# Altium PCB segment_driver_large.PcbDoc
Units mil, origin at the board's own origin, x right, y up, seen from the top; angles counter-clockwise.
Board outline 11250 x 3440 mil, 2 copper layers (Top Layer, Bottom Layer); 36 components, 48 nets, 184 pads, 452 vias.
Unrouted connection lines stored in the file: 31.
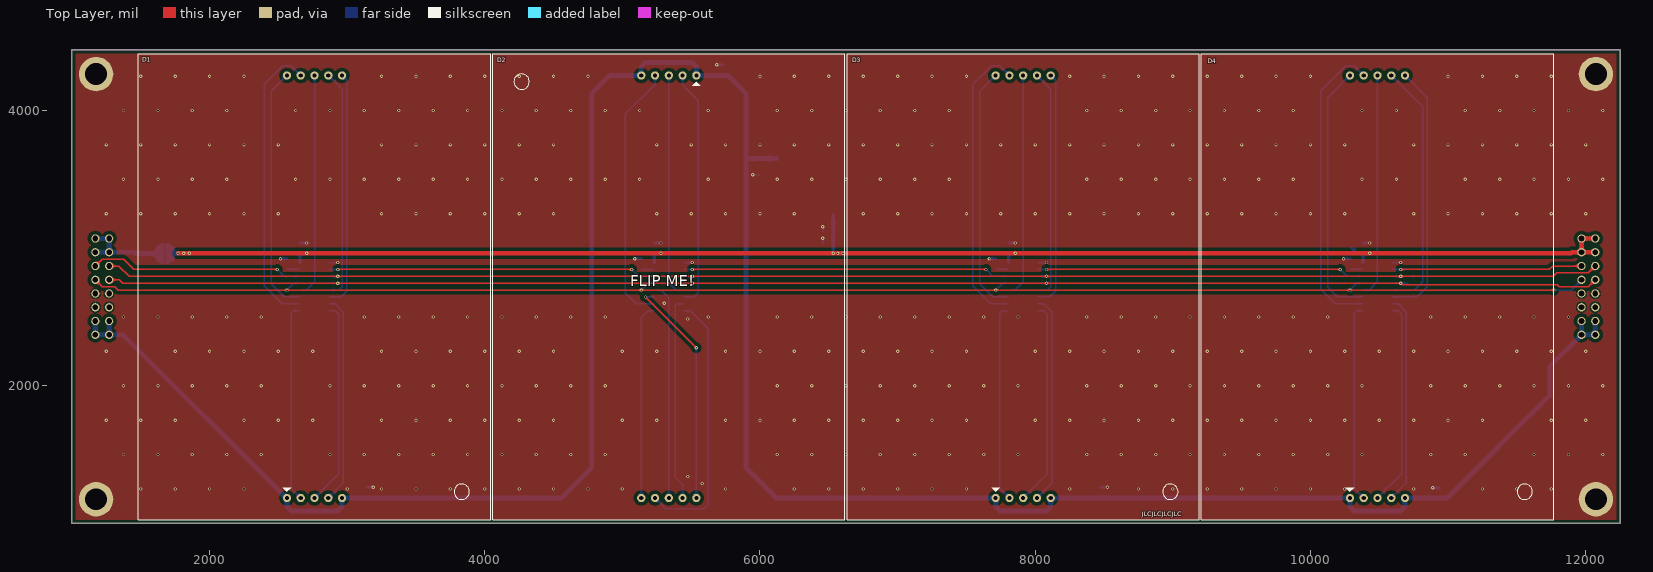
[diagram p0: Top Layer view]
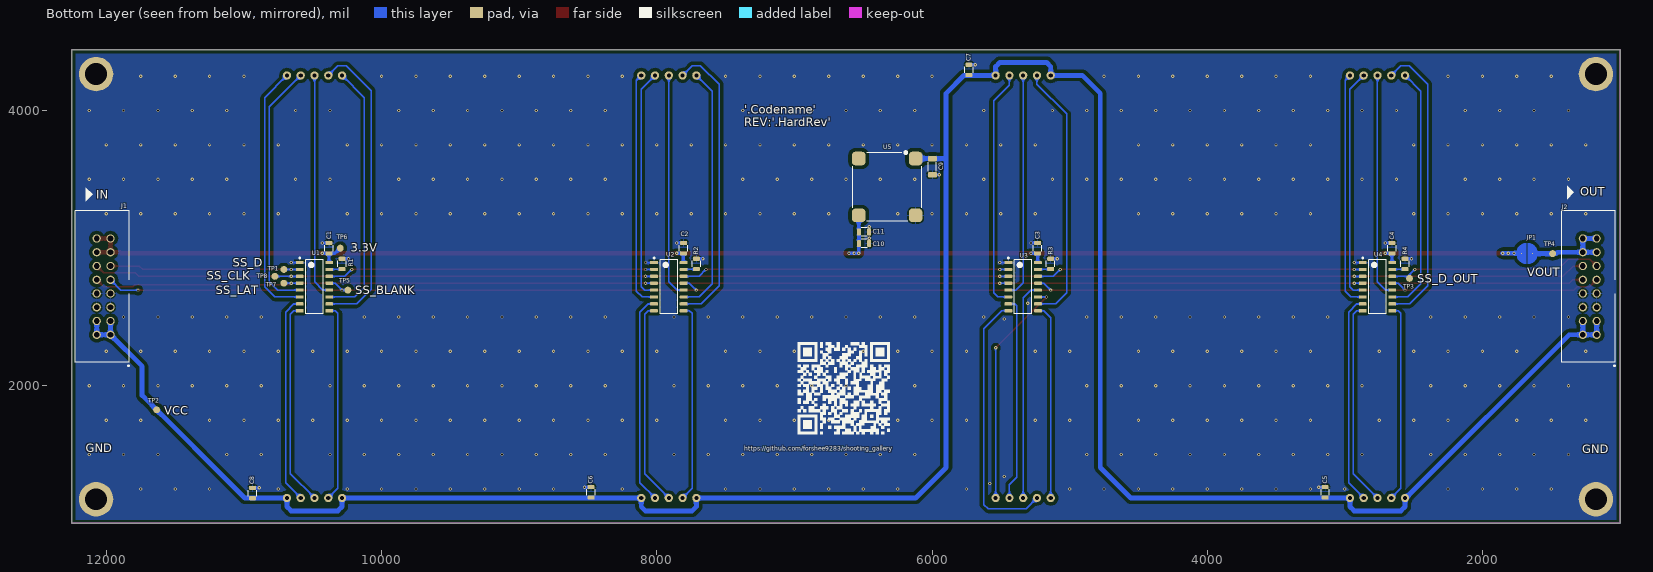
[diagram p1: Bottom Layer view, seen from below]

## Layer stack, top to bottom
Top Solder: solder mask 0.4, Solder Resist, Dk 3.5
Top Layer: signal copper 1.4
Dielectric 1: dielectric 12.6, FR-4, Dk 4.8
Bottom Layer: signal copper 1.4
Bottom Solder: solder mask 0.4, Solder Resist, Dk 3.5

## Board outline
1000,1000 12250,1000 12250,4440 1000,4440

## Design rules (kind name [scope] priority, off if disabled: settings)
Clearance Clearance_Poly [InPolygon] p1: gap=25 ignorepadtopadclearanceinfootprint=FALSE
Clearance [All] p2: gap=10 ignorepadtopadclearanceinfootprint=FALSE
ComponentClearance "JLC Silk" [HasFootprint('JLC_NUMBER')] p1: gap=0 collisioncheckmode=3 verticalgap=0 showdistances=FALSE
ComponentClearance ComponentClearance_1 [All] p2: gap=10 collisioncheckmode=3 verticalgap=10 showdistances=FALSE
HoleSize [All] p1: absolutevalues=TRUE maxlimit=99999 minlimit=1 maxpercent=80.000 minpercent=20.000
MinimumSolderMaskSliver [All] p1: minsoldermaskwidth=2
PolygonConnect PolygonConnect_Mount [IsPad and not InAnyComponent] p1: connectstyle=Direct reliefconductorwidth=10 reliefentries=4 polygonreliefangle="90 Angle" airgapwidth=10
PolygonConnect [All] p2: thpad.connectstyle=Relief thpad.reliefconductorwidth=10 thpad.reliefentries=4 thpad.polygonreliefangle="90 Angle" thpad.airgapwidth=10 smdpad.connectstyle=Relief smdpad.reliefconductorwidth=10 smdpad.reliefentries=4 smdpad.polygonreliefangle="90 Angle" smdpad.airgapwidth=10 via.connectstyle=Direct via.reliefconductorwidth=10 via.reliefentries=4 via.polygonreliefangle="90 Angle" via.airgapwidth=10
RoutingVias [All] p1: holewidth=28 width=50 viastyle="Through Hole" minholewidth=28 minwidth=50 maxholewidth=28 maxwidth=50
SilkToSilkClearance [All] p1: silktosilkclearance=0
SilkToSolderMaskClearance [IsPad] p1: minsilkscreentomaskgap=1 clearancetoexposedcopper=TRUE
SolderMaskExpansion [All] p1: expansion=2 istentingtop=FALSE
SupplyNets "Schematic Supply Nets_4" [InNet('VOUT')] p1: voltage=0.000
SupplyNets "Schematic Supply Nets_3" [InNet('VCC')] p2: voltage=0.000
SupplyNets "Schematic Supply Nets_2" [InNet('3.3V')] p3: voltage=0.000
SupplyNets "Schematic Supply Nets" [InNet('GND')] p4: voltage=0.000
Width [All] p1: maxlimit=9999 minlimit=10 preferedwidth=10
25 further rules are at their usual default settings.

## Components (designator, comment, footprint, x,y, rotation, side; value= is the part's Value field where it differs from the comment)
C1 "0.1µF" Chip0805 10382.5,3000 r270 bottom
C2 "0.1µF" Chip0805 7805,3000 r270 bottom
C3 "0.1µF" Chip0805 5232.5,3000 r270 bottom
C4 "0.1µF" Chip0805 2657.5,3000 r270 bottom
C5 "0.1µF" Chip0805 3142.5,1225 r270 bottom
C6 "0.1µF" Chip0805 8477.5,1225 r270 bottom
C7 "0.1µF" Chip0805 5732.5,4295 r270 bottom
C8 "0.1µF" Chip0805 10937.5,1220 r270 bottom
C9 "10µF" Chip1206 5997,3591.5 r90 bottom
C10 "22µF" Chip0805 6494,3032.5 r0 bottom
C11 "22µF" Chip0805 6494,3117.5 r0 bottom
D1 "SM453001L-2/30" ARKLED_SM453001L 2762.5,2719.57 r0 top locked
D2 "SM453001L-2/30" ARKLED_SM453001L 5337.5,2719.57 r180 top locked
D3 "SM453001L-2/30" ARKLED_SM453001L 7912.5,2719.57 r0 top locked
D4 "SM453001L-2/30" ARKLED_SM453001L 10487.5,2719.57 r0 top locked
J1 "75869-103LF" IDC_100_2x8 12020,2720 r90 bottom
J2 "75869-103LF" IDC_100_2x8 1220,2720 r90 bottom
JP1 "JUMMPER_NO_CIRCLE" JUMMPER_NO_CIRCLE 1676,2961 r270 bottom
M1 "JLC_NUMBER" JLC_NUMBER 8990,625 r0 top
R1 "5.23k" Chip0805 10287.5,2885 r270 bottom
R2 "5.23k" Chip0805 7712.5,2885 r270 bottom
R3 "5.23k" Chip0805 5137.5,2885 r270 bottom
R4 "5.23k" Chip0805 2562.5,2885 r270 bottom
TP1 "TESTPOINT_50mil" TESTPOINT_50mil 10710,2845 r180 bottom
TP2 "TESTPOINT_50mil" TESTPOINT_50mil 11635,1825 r180 bottom
TP3 "TESTPOINT_50mil" TESTPOINT_50mil 2530,2780 r180 bottom
TP4 "TESTPOINT_50mil" TESTPOINT_50mil 1490,2960 r180 bottom
TP5 "TESTPOINT_50mil" TESTPOINT_50mil 10245,2695 r180 bottom
TP6 "TESTPOINT_50mil" TESTPOINT_50mil 10300,3000 r180 bottom
TP7 "TESTPOINT_50mil" TESTPOINT_50mil 10710,2745 r180 bottom
TP8 "TESTPOINT_50mil" TESTPOINT_50mil 10775,2795 r180 bottom
U1 "TLC5916IDR" 16-SOIC 10487.5,2720 r180 bottom
U2 "TLC5916IDR" 16-SOIC 7912.5,2720 r180 bottom
U3 "TLC5916IDR" 16-SOIC 5337.5,2720 r180 bottom
U4 "TLC5916IDR" 16-SOIC 2762.5,2720 r180 bottom
U5 "K7803JT-500R3-LB" MORNSUN_K78XXJT-500R3-LB 6326,3444.5 r270 bottom

## Footprints (in the part's own frame and the unit in brackets; to place one, negate y for a bottom-side part, rotate by r counter-clockwise, add the part's x,y. Pads: shape width x height; smd on the part's side, far side on the other; paste and mask are expansions set on the pad)
16-SOIC [mm] "SOIC, 16-Leads, Body 9.90x3.90mm, Pitch 1.27mm, IPC Medium Density"
  rect 1.45x0.6 smd: 1(-2.725,4.445)
  rrect50% 1.45x0.6 smd: 2(-2.725,3.175) 3(-2.725,1.905) 4(-2.725,0.635) 5(-2.725,-0.635) 6(-2.725,-1.905) 7(-2.725,-3.175) 8(-2.725,-4.445) 9(2.725,-4.445) 10(2.725,-3.175) 11(2.725,-1.905) 12(2.725,-0.635) 13(2.725,0.635) 14(2.725,1.905) 15(2.725,3.175) 16(2.725,4.445)
  silkscreen extent -2.85,-5 1.6,5.42, body extent -2,-5 2,5, height 1.75
ARKLED_SM453001L [mil]
  round 60 hole 30: 1(-200,-1535.43) 2(-100,-1535.43) 3(0,-1535.43) 4(100,-1535.43) 5(200,-1535.43) 6(200,1535.43) 7(100,1535.43) 8(0,1535.43) 9(-100,1535.43) 10(-200,1535.43)
  silkscreen extent -1280,-1693 1280,1693, body extent -1280,-1693 1280,1693, height 477
Chip0805 [mm] "Chip Resistor, 2-Leads, Body 2.05x1.25mm, IPC Medium Density"
  rrect50% 0.75x1.3 smd: 1(-0.955,0) 2(0.955,0)
  silkscreen extent -0.55,-0.77 0.55,0.77, body extent -0.95,-0.55 0.95,0.55, height 0.5
Chip1206 [mm] "Chip Resistor, 2-Leads, Body 3.15x1.60mm, IPC Medium Density"
  rrect50% 1x1.7 smd: 1(-1.5,0) 2(1.5,0)
  silkscreen extent -0.8,-0.75 0.8,0.75, body extent -1.5,-0.72 1.5,0.72, height 0.6
IDC_100_2x8 [mil]
  round 60 hole 41: 1(-350,-50) 2(-350,50) 3(-250,-50) 4(-250,50) 5(-150,-50) 6(-150,50) 7(-50,-50) 8(-50,50) 9(50,-50) 10(50,50) 11(150,-50) 12(150,50) 13(250,-50) 14(250,50) 15(350,-50) 16(350,50)
  silkscreen extent -580,-185 550,205, body extent -542,-175 542,190, height 368
JLC_NUMBER [mil]
JUMMPER_NO_CIRCLE [mil]
  round 1 smd: 1(0,40) 2(0,-40)
  Top Layer region: 75.5,5 -75.5,5 -70.17,31.78 -55,54.47 -32.3,69.64 -5.53,74.97 -5.53,74.97 5.53,74.97 32.3,69.64 55,54.47 70.17,31.78 75.5,5
  Top Layer region: -75.5,-5 75.5,-5 70.17,-31.78 55,-54.47 32.3,-69.64 5.53,-74.97 5.53,-74.97 -5.53,-74.97 -32.3,-69.64 -55,-54.47 -70.17,-31.78 -75.5,-5
  Top Layer region: 0,-70 -11.48,-67.72 -21.21,-61.21 -27.72,-51.48 -30,-40 -30,-40 -27.72,-28.52 -21.21,-18.79 -11.48,-12.28 0,-10 0,-10 11.48,-12.28 21.21,-18.79 27.72,-28.52 30,-40 30,-40 27.72,-51.48 21.21,-61.21 11.48,-67.72 0,-70
  Top Layer region: 0,10 -11.48,12.28 -21.21,18.79 -27.72,28.52 -30,40 -30,40 -27.72,51.48 -21.21,61.21 -11.48,67.72 0,70 0,70 11.48,67.72 21.21,61.21 27.72,51.48 30,40 30,40 27.72,28.52 21.21,18.79 11.48,12.28 0,10
MORNSUN_K78XXJT-500R3-LB [mm]
  rrect50% 2.5x2.5 smd: 1(-5.25,5.25) 2(-5.25,-5.25) 3(5.25,-5.25) 4(5.25,5.25)
  silkscreen extent -6.53,-6.35 6.35,6.35, body extent -6.06,-6.06 6.06,6.06, height 4.52
TESTPOINT_50mil [mil]
  round 50 smd: 1(0,0)

## Part data
C1 C2 C3 C4 C5 C6 C7 C8: library part C2012X7T2E104K125AA, "CAP CER 0.1UF 250V 10% X7T 0805", Manufacturer="TDK Corporation", Operating Temperature="-55°C ~ 125°C", Package / Case="0805 (2012 Metric)", Ratings=-, Supplier Part Number 1=445-7749-1-ND, Temperature Coefficient=X7T, Tolerance=±10%, Voltage=250V, Applications="General Purpose", Capacitance=0.1µF, Features=-, Height - Seated (Max)=-, HelpURL=http://product.tdk.com/capacitor/mlcc/en/documents/mlcc_commercial_midvoltage_en.pdf, Lead Spacing=-, Lead Style=-, Manufacturer Part Number=C2012X7T2E104K125AA, Mounting Type="Surface Mount, MLCC", PartNumber=C2012X7T2E104K125AA, Series=C, Size / Dimension="0.079\" L x 0.049\" W (2.00mm x 1.25mm)", Supplier 1=Digi-Key, Supplier 2=Mouser, Thickness (Max)="0.057\" (1.45mm)"
C9: library part C3216X5R1H106K160AB, "CAP CER 10UF 50V 10% X5R 1206", Manufacturer="TDK Corporation", Operating Temperature="-55°C ~ 85°C", Package / Case="1206 (3216 Metric)", Ratings=-, Supplier Part Number 1=445-5998-1-ND, Temperature Coefficient=X5R, Tolerance=±10%, Voltage=50V, Applications="General Purpose", Capacitance=10µF, Features=-, Height - Seated (Max)=-, HelpURL=http://product.tdk.com/capacitor/mlcc/en/documents/mlcc_commercial_general_en.pdf, Lead Spacing=-, Lead Style=-, Manufacturer Part Number=C3216X5R1H106K160AB, Mounting Type="Surface Mount, MLCC", PartNumber=C3216X5R1H106K160AB, Series=C, Size / Dimension="0.126\" L x 0.063\" W (3.20mm x 1.60mm)", Supplier 1=Digi-Key, Supplier 2=Mouser, Thickness (Max)="0.071\" (1.80mm)"
C10 C11: library part C2012X5R1A226M085AC, "CAP CER 22UF 10V 20% X5R 0805", Manufacturer="TDK Corporation", Operating Temperature="-55°C ~ 85°C", Package / Case="0805 (2012 Metric)", Ratings=-, Supplier Part Number 1=445-7663-1-ND, Temperature Coefficient=X5R, Tolerance=±20%, Voltage=10V, Applications="General Purpose", Capacitance=22µF, Features=-, Height - Seated (Max)=-, HelpURL=http://product.tdk.com/capacitor/mlcc/en/documents/mlcc_commercial_general_en.pdf, Lead Spacing=-, Lead Style=-, Manufacturer Part Number=C2012X5R1A226M085AC, Mounting Type="Surface Mount, MLCC", PartNumber=C2012X5R1A226M085AC, Series=C, Size / Dimension="0.079\" L x 0.049\" W (2.00mm x 1.25mm)", Supplier 1=Digi-Key, Supplier 2=Mouser, Thickness (Max)="0.037\" (0.95mm)"
D1 D2 D3 D4: "SEGMENTS DISPLAY 3.0\" COMMON ANODE", Manufacturer=ARKLED, Datasheets=https://www.lcsc.com/datasheet/lcsc_datasheet_2405201814_ARKLED-Wuxi-ARK-Tech-Elec-SM453001L-2-30_C164873.pdf, Manufacturer Part Number=SM453001L-2/30, PartNumber=SM453001L-2/30, Supplier 1=Digi-Key, Supplier 2=Mouser, Supplier 3=LCSC, Supplier Part Number 3=C164873
J1 J2: "CONN HEADER 16POS DUAL VERT PCB", Manufacturer=FCI, Supplier Part Number 1=609-1775-ND, HelpURL=http://portal.fciconnect.com/Comergent//fci/drawing/75869.pdf, Manufacturer Part Number=75869-103LF, PartNumber=75869-103LF, Supplier 1=Digi-Key, Supplier 2=Mouser, Supplier Part Number 2=649-75869-103LF
M1: "JLC Order Number Location", Manufacturer Part Number=JLC_NUMBER, PartNumber=JLC_NUMBER
R1 R2 R3 R4: library part CRCW08055K23FKEA, "RES 5.23K OHM 1/8W 1% 0805 SMD", Manufacturer="Vishay Dale", Package / Case="0805 (2012 Metric)", Power (Watts)="0.125W, 1/8W", Supplier Part Number 1=541-5.23KCCT-ND, Temperature Coefficient=±100ppm/°C, Tolerance=±1%, Composition="Thick Film", Features="Automotive AEC-Q200 Qualified", Height="0.020\" (0.50mm)", HelpURL=http://www.vishay.com/doc?20035, Manufacturer Part Number=CRCW08055K23FKEA, Number of Terminations=2, PartNumber=CRCW08055K23FKEA, Resistance=5.23k, Series=CRCW, Size / Dimension="0.079\" L x 0.049\" W (2.00mm x 1.25mm)", Supplier 1=Digi-Key, Supplier 2=Mouser, Supplier Device Package="0805 (2012 Metric)"
U1 U2 U3 U4: "IC LED DRVR LINEAR 120MA 16SOIC", Manufacturer="Texas Instruments", Supplier Part Number 1=296-22710-2-ND, HelpURL=https://www.ti.com/lit/ds/symlink/tlc5916.pdf, Manufacturer Part Number=TLC5916IDR, PartNumber=TLC5916IDR, Supplier 1=Digi-Key, Supplier 2=Mouser, Supplier Part Number 2=595-TLC5916IDR
U5: "LINEAR REGULATOR REPLACEMENT DC", Manufacturer="Mornsun America, LLC", Supplier Part Number 1=2725-K7803JT-500R3-LBCT-ND, HelpURL=https://www.mornsun-power.com/html/pdf/K7803JT-500R3-LB.html, Manufacturer Part Number=K7803JT-500R3-LB, PartNumber=K7803JT-500R3-LB, Supplier 1=Digi-Key
JP1: Manufacturer Part Number=JUMMPER_NO_CIRCLE, PartNumber=JUMMPER_NO_CIRCLE
TP1 TP2 TP3 TP4 TP5 TP6 TP7 TP8: Manufacturer Part Number=TESTPOINT_50mil, PartNumber=TESTPOINT_50mil

## Free pads (board coordinates)
  round 250 hole 158: ""(1175,1175) ""(1175,4265) ""(12075,1175) ""(12075,4265)

## Via types
v1: diameter 24, hole 12, Top Layer to Bottom Layer, tented both sides, 452 vias

## Nets (pads, with @x,y where several pads share a name; then routed paths per layer and width w, separated by ;. In a path a pad name is that pad's centre, name@x,y a point inside that pad or via, vN(x,y) a via of type N, cw(c..) or ccw(c..) an arc to the next point about the centre after c; other vN are vias at no path point)
3.3V: C1.2 C2.2 C3.2 C4.2 C10.2 C11.2 J1.13 J1.14 J1.15 J1.16 JP1.2 TP6.1 U1.16 U2.16 U3.16 U4.16 U5.3 | length 11534.9
  Top Layer w30: v1(1770.1,2962.4) v1(2705.1,2962.4) v1(5280.1,2962.4) v1(7855.1,2962.4) v1(10430.1,2962.4) 11892.4,2962.4 11900,2970 J1.13 ; J1.14 J1.13 ; J1.16 J1.15 J1.13
  Bottom Layer w20: U4.16 2655.69,2895 2657.5,2896.81 C4.2 v1(2705.1,2962.4) ; U3.16 5230.69,2895 5232.5,2896.81 C3.2 v1(5280.1,2962.4) ; U2.16 7805.69,2895 7807.5,2896.81 7807.5,2962.4 v1(7855.1,2962.4) ; TP6.1 10337.6,2962.4 C1.2 ; U1.16 10380.69,2895 10382.5,2896.81 C1.2 ; v1(10430.1,2962.4) C1.2
  Bottom Layer w25: C10.2 6532.16,3031.94 v1(6532.16,2962.44) v1(6566.16,2962.44) v1(6603.16,2962.44) ; C10.2@6532.15,3033.05 6532.15,3237.26 U5.3
  Bottom Layer w35: 1731,2962.4 v1(1770.1,2962.4) v1@1853.6,2962.4
  other v1: 1811.5,2962 1851.5,2962
GND: C1.1 C2.1 C3.1 C4.1 C5.1 C6.1 C7.1 C8.1 C9.1 C10.1 C11.1 J1.5 J1.6 J1.7 J1.8 J2.5 J2.6 J2.7 J2.8 pad. R1.1 R2.1 R3.1 R4.1 U1.1 U2.1 U3.1 U4.1 U5.4 | length 948.5
  Bottom Layer w10: U4.1 v1(2932.5,2895) ; U3.1 v1(5507.5,2895) ; v1(5947,3532.5) 5947.06,3532.44 C9.1 ; C10.1 v1(6456.4,3071.1) ; C11.1 v1(6456.4,3156.1) ; U2.1 v1(8082.5,2895) ; U1.1 v1(10657.5,2895)
  Bottom Layer w20: v1(2514.9,2922.6) R4.1 ; C4.1 v1(2705.1,3037.6) ; C5.1 v1(3189.9,1262.6) ; v1(5089.9,2922.6) R3.1 ; C3.1 v1(5280.1,3037.6) ; v1(5685.1,4332.6) C7.1 ; v1(7664.9,2922.6) R2.1 ; C2.1@7807.5,3037.6 v1(7855.1,3037.6) ; C6.1 v1(8524.9,1262.6) ; v1(10239.9,2922.6) R1.1 ; C1.1 v1(10430.1,3037.6) ; v1(10890.1,1257.6) C8.1
  other v1: 1500,1250 1750,1250 2000,1250 2250,1250 3000,1250 3250,1250 3500,1250 3750,1250 4000,1250 4250,1250 4500,1250 4750,1250 5000,1250 5750,1250 6250,1250 6500,1250 6750,1250 7000,1250 7250,1250 7500,1250 8250,1250 8750,1250 9000,1250 9250,1250 9500,1250 9750,1250 10000,1250 10250,1250 10750,1250 11250,1250 11500,1250 11750,1250 5580,1290 5475,1340 1375,1500 1625,1500 1875,1500 2125,1500 2375,1500 2875,1500 3125,1500 3375,1500 3625,1500 3875,1500 4125,1500 4375,1500 4625,1500 4875,1500 6125,1500 6375,1500 6625,1500 6875,1500 7125,1500 7375,1500 7625,1500 7875,1500 8375,1500 8625,1500 8875,1500 9125,1500 9375,1500 9625,1500 9875,1500 10125,1500 10375,1500 10875,1500 11125,1500 11625,1500 11875,1500 12125,1500 1250,1750 1500,1750 1750,1750 2250,1750 2500,1750 2750,1750 3250,1750 3500,1750 3750,1750 4000,1750 4250,1750 4500,1750 5000,1750 5250,1750 5750,1750 6000,1750 6250,1750 6500,1750 6750,1750 7000,1750 7250,1750 7500,1750 8000,1750 8250,1750 8500,1750 8750,1750 9000,1750 9250,1750 9500,1750 9750,1750 10000,1750 10250,1750 10500,1750 10750,1750 11000,1750 11250,1750 11750,1750 12000,1750 1375,2000 1625,2000 1875,2000 2125,2000 2375,2000 2875,2000 3125,2000 3375,2000 3625,2000 3875,2000 4125,2000 4375,2000 4625,2000 4875,2000 6125,2000 6375,2000 6625,2000 6875,2000 7125,2000 7375,2000 7625,2000 7875,2000 8375,2000 8625,2000 8875,2000 9125,2000 9375,2000 9625,2000 9875,2000 10125,2000 10375,2000 10875,2000 11125,2000 11375,2000 11625,2000 11875,2000 12125,2000 1250,2250 1750,2250 2000,2250 2250,2250 2500,2250 2750,2250 3250,2250 3500,2250 3750,2250 4000,2250 4250,2250 4500,2250 5000,2250 5250,2250 5750,2250 6000,2250 6250,2250 6500,2250 6750,2250 7000,2250 7250,2250 7500,2250 8000,2250 8250,2250 8500,2250 8750,2250 9000,2250 9250,2250 9500,2250 9750,2250 10000,2250 10250,2250 10500,2250 10750,2250 11000,2250 11250,2250 11500,2250 11750,2250 12000,2250 5475,2485 1375,2500 1625,2500 1875,2500 2125,2500 2375,2500 3125,2500 3375,2500 3625,2500 3875,2500 4125,2500 4375,2500 4625,2500 4875,2500 5625,2500 6125,2500 6375,2500 6625,2500 6875,2500 7125,2500 7375,2500 7625,2500 7875,2500 8375,2500 8625,2500 8875,2500 9125,2500 9375,2500 9625,2500 9875,2500 10125,2500 10875,2500 11125,2500 11375,2500 11625,2500 11875,2500 5305,2600 1250,3250 1500,3250 1750,3250 2000,3250 2250,3250 2500,3250 3250,3250 3500,3250 3750,3250 4000,3250 4250,3250 4500,3250 5250,3250 5500,3250 5750,3250 6000,3250 6250,3250 6750,3250 7000,3250 7250,3250 7500,3250 7750,3250 8000,3250 8250,3250 8500,3250 8750,3250 9000,3250 9250,3250 9500,3250 9750,3250 10000,3250 10250,3250 10750,3250 11000,3250 11250,3250 11500,3250 11750,3250 12000,3250 1375,3500 1625,3500 1875,3500 2125,3500 2625,3500 2875,3500 3125,3500 3375,3500 3625,3500 3875,3500 4125,3500 4375,3500 4625,3500 4875,3500 5125,3500 5625,3500 6125,3500 6375,3500 6625,3500 6875,3500 7125,3500 7375,3500 8375,3500 8625,3500 8875,3500 9125,3500 9375,3500 9625,3500 9875,3500 10375,3500 10625,3500 11125,3500 11375,3500 11625,3500 11875,3500 12125,3500 1250,3750 1500,3750 1750,3750 2000,3750 2250,3750 2500,3750 3250,3750 3500,3750 3750,3750 4000,3750 4250,3750 4500,3750 5250,3750 5500,3750 5750,3750 6000,3750 6250,3750 6500,3750 6750,3750 7000,3750 7250,3750 7500,3750 7750,3750 8000,3750 8250,3750 8500,3750 8750,3750 9000,3750 9250,3750 9500,3750 9750,3750 10000,3750 10250,3750 10750,3750 11000,3750 11250,3750 11500,3750 11750,3750 12000,3750 1375,4000 1625,4000 1875,4000 2125,4000 2625,4000 2875,4000 3125,4000 3375,4000 3625,4000 3875,4000 4125,4000 4375,4000 4625,4000 4875,4000 5125,4000 5625,4000 6125,4000 6375,4000 6625,4000 6875,4000 7125,4000 7375,4000 8375,4000 8625,4000 8875,4000 9125,4000 9375,4000 9625,4000 9875,4000 10375,4000 10625,4000 11125,4000 11375,4000 11625,4000 11875,4000 12125,4000 1500,4250 1750,4250 2000,4250 2250,4250 3250,4250 3500,4250 3750,4250 4000,4250 4250,4250 4500,4250 4750,4250 6000,4250 6250,4250 6500,4250 6750,4250 7000,4250 7250,4250 7500,4250 8250,4250 8500,4250 8750,4250 9000,4250 9250,4250 9500,4250 9750,4250 10000,4250 11000,4250 11250,4250 11500,4250 11750,4250
NetR1_2: R1.2 U1.15 | length 93.7
  Bottom Layer w10: R1.2 10288.7,2846.2 10379.02,2846.2 U1.15
NetR2_2: R2.2 U2.15 | length 93.7
  Bottom Layer w10: R2.2 7713.7,2846.2 7804.02,2846.2 U2.15
NetR3_2: R3.2 U3.15 | length 93.7
  Bottom Layer w10: R3.2 5138.7,2846.2 5229.02,2846.2 U3.15
NetR4_2: R4.2 U4.15 | length 93.7
  Bottom Layer w10: R4.2 2563.7,2846.2 2654.02,2846.2 U4.15
SS_1_A: D1.7 U4.5 | length 1679.5
  Bottom Layer w10: D1.7 2962.5,4155 2962.5,2720 2937.5,2695 U4.5
SS_1_B: D1.6 U4.6 | length 1728.8
  Bottom Layer w10: U4.6 2957.5,2645 2997.5,2685 2997.5,4220 D1.6
SS_1_C: D1.4 U4.7 | length 1524
  Bottom Layer w10: D1.4 2972.5,1294.13 2972.5,2535 2912.5,2595 U4.7
SS_1_D: D1.3 U4.8 | length 1486.4
  Bottom Layer w10: D1.3 2937.5,1359.13 2937.5,2520 2912.5,2545 U4.8
SS_1_DP: D1.8 U4.12 | length 1632.1
  Bottom Layer w10: U4.12 2702.5,2695 2762.5,2755 D1.8
SS_1_E: D1.2 U4.9 | length 1440.9
  Bottom Layer w10: U4.9 2612.5,2545 2592.5,2525 2592.5,1254.13 D1.2
SS_1_F: D1.9 U4.10 | length 2126.5
  Bottom Layer w10: U4.10 2527.5,2595 2397.5,2725 2397.5,4190 2532.5,4325 2592.5,4325 D1.9
SS_1_G: D1.10 U4.11 | length 1809.7
  Bottom Layer w10: D1.10 2447.5,4140 2447.5,2740 2542.5,2645 U4.11
SS_2_A: D2.3 U3.5 | length 1635.1
  Bottom Layer w10: D2.3 5337.5,2750 5392.5,2695 U3.5
SS_2_B: D2.2 U3.6 | length 1747.8
  Bottom Layer w10: D2.2 5437.5,4185 5552.5,4070 5552.5,2675 5522.5,2645 U3.6
SS_2_C: D2.9 U3.7 | length 1487.1
  Bottom Layer w10: D2.9 5437.5,1280 5382.5,1335 5382.5,2580 5397.5,2595 U3.7
SS_2_D: D2.7 U3.8 | length 1941.8
  Bottom Layer w10: D2.7 5316.63,1105 5592.5,1105 5622.5,1135 5622.5,2415 5492.5,2545 U3.8
SS_2_DP: D2.8 U3.12 | length 1585.9
  Bottom Layer w10: U3.12 5282.5,2695 5337.5,2640 D2.8
SS_2_E: D2.6 U3.9 | length 1424.3
  Bottom Layer w10: D2.6 5137.5,2495 5187.5,2545 U3.9
SS_2_F: D2.4 U3.10 | length 1909.9
  Bottom Layer w10: U3.10 5102.5,2595 5022.5,2675 5022.5,3975 5237.5,4190 D2.4
SS_2_G: D2.10 U3.11 | length 1676.8
  Top Layer w10: v1(5167.5,2645) v1(5537.5,2275)
  Bottom Layer w10: v1(5167.5,2645) U3.11 ; D2.10 v1(5537.5,2275)
SS_3_A: D3.7 U2.5 | length 1679.5
  Bottom Layer w10: D3.7 8112.5,4155 8112.5,2720 8087.5,2695 U2.5
SS_3_B: D3.6 U2.6 | length 1728.8
  Bottom Layer w10: U2.6 8107.5,2645 8147.5,2685 8147.5,4220 D3.6
SS_3_C: D3.4 U2.7 | length 1524
  Bottom Layer w10: D3.4 8122.5,1294.13 8122.5,2535 8062.5,2595 U2.7
SS_3_D: D3.3 U2.8 | length 1486.4
  Bottom Layer w10: D3.3 8087.5,1359.13 8087.5,2520 8062.5,2545 U2.8
SS_3_DP: D3.8 U2.12 | length 1632.1
  Bottom Layer w10: U2.12 7852.5,2695 7912.5,2755 D3.8
SS_3_E: D3.2 U2.9 | length 1440.9
  Bottom Layer w10: U2.9 7762.5,2545 7742.5,2525 7742.5,1254.13 D3.2
SS_3_F: D3.9 U2.10 | length 2126.5
  Bottom Layer w10: U2.10 7677.5,2595 7547.5,2725 7547.5,4190 7682.5,4325 7742.5,4325 D3.9
SS_3_G: D3.10 U2.11 | length 1809.7
  Bottom Layer w10: D3.10 7597.5,4140 7597.5,2740 7692.5,2645 U2.11
SS_4_A: D4.7 U1.5 | length 1839.3
  Bottom Layer w10: D4.7 10815,4027.5 10815,2755 10755,2695 U1.5
SS_4_B: D4.6 U1.6 | length 1888.6
  Bottom Layer w10: U1.6 10775,2645 10850,2720 10850,4092.5 D4.6
SS_4_C: D4.4 U1.7 | length 1524
  Bottom Layer w10: D4.4 10697.5,1294.13 10697.5,2535 10637.5,2595 U1.7
SS_4_D: D4.3 U1.8 | length 1486.4
  Bottom Layer w10: D4.3 10662.5,1359.13 10662.5,2520 10637.5,2545 U1.8
SS_4_DP: D4.8 U1.12 | length 1632.1
  Bottom Layer w10: U1.12 10427.5,2695 10487.5,2755 D4.8
SS_4_E: D4.2 U1.9 | length 1440.9
  Bottom Layer w10: U1.9 10337.5,2545 10317.5,2525 10317.5,1254.13 D4.2
SS_4_F: D4.9 U1.10 | length 2208.3
  Bottom Layer w10: U1.10 10180,2595 10075,2700 10075,4142.5 10257.5,4325 10317.5,4325 D4.9
SS_4_G: D4.10 U1.11 | length 1891.5
  Bottom Layer w10: D4.10 10125,4092.5 10125,2715 10195,2645 U1.11
SS_BLANK: J1.9 J2.9 TP5.1 U1.13 U2.13 U3.13 U4.13 | length 11358.3
  Top Layer w10: J2.9 1220,2720 1311.17,2720 1336.17,2695 v1(2562.5,2695) v1(5137.5,2695) v1(7712.5,2695) v1(10287.5,2695) v1(11770,2695)
  Bottom Layer w10: v1(2562.5,2695) 2612.5,2745 U4.13 ; v1(5137.5,2695) 5187.5,2745 U3.13 ; v1(7712.5,2695) 7762.5,2745 U2.13 ; TP5.1 v1(10287.5,2695) 10337.5,2745 U1.13 ; v1(11770,2695) 11895,2695 J1.9
SS_CLK: J1.12 J2.12 TP8.1 U1.3 U2.3 U3.3 U4.3 | length 11230.5
  Top Layer w10: J2.12 1340,2870 1415,2795 v1(2932.5,2795) v1(5507.5,2795) v1(8082.5,2795) v1(10657.5,2795) 11765,2795 11790,2820 12020,2820 J1.12
  Bottom Layer w10: U4.3 v1(2932.5,2795) ; U3.3 v1(5507.5,2795) ; U2.3 v1(8082.5,2795) ; U1.3 v1(10657.5,2795) TP8.1
SS_D: J1.11 TP1.1 U1.2 | length 1438.1
  Top Layer w10: v1(10657.5,2845) 11735,2845 11760,2870 J1.11
  Bottom Layer w10: U1.2 v1(10657.5,2845) TP1.1
SS_D_CHAIN0: U1.14 U2.2 | length 2381.1
  Top Layer w10: v1(8082.5,2845) v1(10217.5,2845)
  Bottom Layer w10: U2.2 v1(8082.5,2845) ; v1(10217.5,2845) 10267.5,2795 U1.14
SS_D_CHAIN1: U2.14 U3.2 | length 2381.1
  Top Layer w10: v1(5507.5,2845) v1(7642.5,2845)
  Bottom Layer w10: U3.2 v1(5507.5,2845) ; v1(7642.5,2845) 7692.5,2795 U2.14
SS_D_CHAIN2: U3.14 U4.2 | length 2381.1
  Top Layer w10: v1(2932.5,2845) v1(5067.5,2845)
  Bottom Layer w10: U4.2 v1(2932.5,2845) ; v1(5067.5,2845) 5117.5,2795 U3.14
SS_D_OUT: J2.11 TP3.1 U4.14 | length 1557.7
  Top Layer w10: J2.11 1220,2920 1375,2920 1450,2845 v1(2492.5,2845)
  Bottom Layer w10: v1(2492.5,2845) 2542.5,2795 U4.14
SS_LAT: J1.10 J2.10 TP7.1 U1.4 U2.4 U3.4 U4.4 | length 11144.8
  Top Layer w10: J2.10 1345,2770 1370,2745 v1(2932.5,2745) v1(5507.5,2745) v1(8082.5,2745) v1(10657.5,2745) 10660.36,2745 10670.36,2735 11795,2735 11810,2720 12020,2720 J1.10
  Bottom Layer w10: U4.4 v1(2932.5,2745) ; U3.4 v1(5507.5,2745) ; U2.4 v1(8082.5,2745) ; U1.4 v1(10657.5,2745) TP7.1
VCC: C5.2 C6.2 C7.2 C8.2 C9.2 D1.1 D1.5 D2.1 D2.5 D3.1 D3.5 D4.1 D4.5 J1.1 J1.2 J1.3 J1.4 J2.1 J2.2 J2.3 J2.4 TP2.1 U5.1 | length 18970.2
  Bottom Layer w35: J2.3 J2.1 J2.2 ; J2.4 J2.2 ; U5.1 6118.99,3650.87 5997.32,3650.87 C9.2 5898.06,3650.56 5897.5,3650 ; J1.3 J1.1 ; J1.4 J1.2 J1.1 ; J2.2 1370,2370 2555.87,1184.13 D1.1 2562.5,1120 2592.5,1090 2932.5,1090 2962.5,1120 D1.5 4556.06,1184.13 4777.5,1405.57 4777.5,4125 4907.5,4255 D2.5 5137.5,4319.13 5167.5,4349.13 5507.5,4349.13 5537.5,4319.13 D2.1 5767.5,4255 5897.5,4125 5897.5,3650 ; 5897.5,3650 5897.5,1405.57 6118.94,1184.13 D3.1 7712.5,1120 7742.5,1090 8082.5,1090 8112.5,1120 D3.5 D4.1 10287.5,1120 10317.5,1090 10657.5,1090 10687.5,1120 D4.5 10937.5,1184.13 10994.13,1184.13 11740,1930 11740,2140 J1.1
VOUT: J2.13 J2.14 J2.15 J2.16 JP1.1 TP4.1 | length 670.6
  Bottom Layer w35: J2.13 J2.14 ; J2.15 J2.16 J2.14 ; JP1.1 1635,2960 1465,2960 1455,2970 J2.14
pads on no net: U5.2

## Polygon pours and split planes (outlines as drawn)
GND on Bottom Layer "Bottom GND" (solid, remove dead copper, pour order 3): 1000,4440 12250,4440 12250,1000 1000,1000
GND on Top Layer "Top GND" (solid, remove dead copper, pour order 2): 1000,4440 12250,4440 12250,1000 1000,1000

## Keep-outs
Keep-Out Layer:
  the board outline again, w1.97

## Silkscreen, mask and mechanical layers (free items; w line width, h text height)
Top Overlay:
  text "FLIP ME!" at 5057,2722 h80
Bottom Overlay:
  drawing of 92 lines, arcs and shapes, not listed
  text "'.Codename'  / REV:'.HardRev'" at 7365,3885 h62
  text "OUT" at 1290,3380 h60
  text "IN" at 12075,3360 h60
  text "3.3V" at 10225,2975 h60
  text "SS_D" at 11080,2865 h60
  text "VOUT" at 1675,2795 h60
  text "SS_CLK" at 11270,2770 h60
  text "SS_D_OUT" at 2475,2750 h60
  text "SS_BLANK" at 10190,2665 h60
  text "SS_LAT" at 11205,2665 h60
  text "VCC" at 11580,1790 h60
  text "https://github.com/forshee9283/shooting_gallery" at 7364,1526.33 h31
  text "GND" at 12150,1515 h60
  text "GND" at 1275,1510 h60
Top Solder:
  text "é" at 11559,4186 h650
Bottom Solder:
  rectangle: 11825,1595 12250,2125
  region: 1425,2125 1000,2125 1000,1595 1425,1595
  text "é" at 11736,4132 h650
Mechanical 1:
  the board outline again, w1.97

## Text inside footprints (layer, text, board x,y; h text height)
M1: Top Overlay "JLCJLCJLCJLC" at 8774.85,1052.87 h33.46